# Altium PCB pcb.PcbDoc (part 2 of 6)
Units mm, origin at the board's own origin, x right, y up, seen from the top; angles counter-clockwise.
Board outline 85.44 x 182.72 mm, 2 copper layers (Top Layer, Bottom Layer); 68 components, 54 nets, 232 pads, 184 vias.
Unrouted connection lines stored in the file: 53.
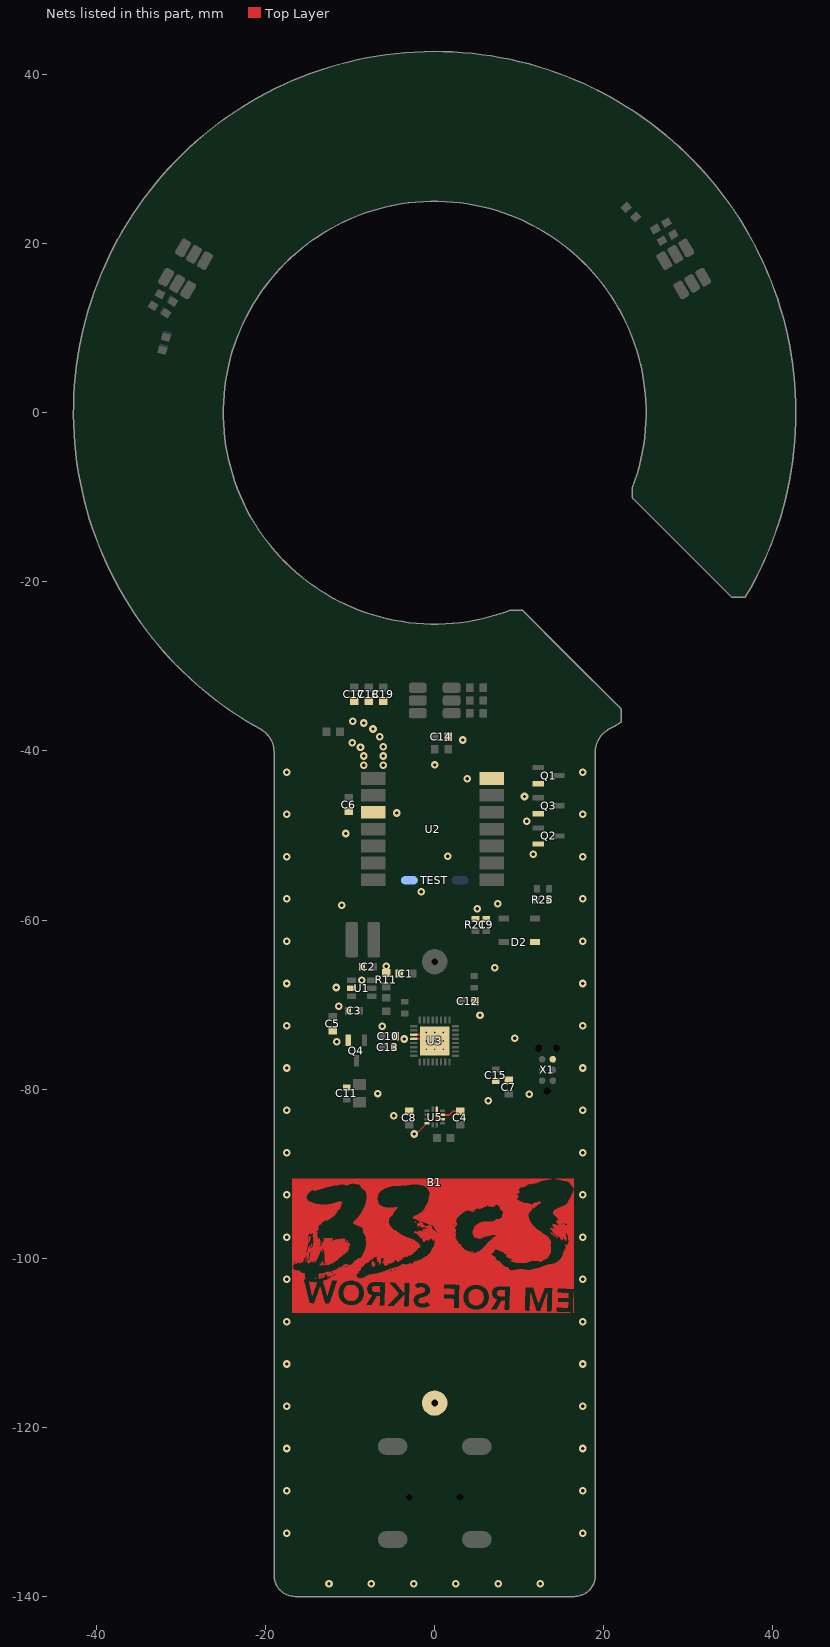
[diagram p2: the nets of this part, all layers, seen from the top]

## Via types
v1: diameter 0.9, hole 0.4, Top Layer to Bottom Layer, 143 vias
v2: diameter 1.27, hole 0.7, Top Layer to Bottom Layer, 32 vias
v3: diameter 0.5, hole 0.2, Top Layer to Bottom Layer, 9 vias

## Nets (pads, with @x,y where several pads share a name; then routed paths per layer and width w, separated by ;. In a path a pad name is that pad's centre, name@x,y a point inside that pad or via, vN(x,y) a via of type N, cw(c..) or ccw(c..) an arc to the next point about the centre after c; other vN are vias at no path point) (continued)
GND: (continued)
  Top Layer w0.025: -16.861,-106.391 16.007,-106.391 ; -16.861,-106.366 15.296,-106.366 ; -16.861,-106.34 14.534,-106.34 ; -16.861,-106.315 13.822,-106.315 ; -16.861,-106.29 13.238,-106.29 ; -16.861,-106.264 12.375,-106.264 ; -16.861,-106.239 12.019,-106.239 ; -16.861,-106.213 10.901,-106.213 ; -16.861,-106.188 10.622,-106.188 ; -16.861,-106.163 10.622,-106.163 ; -16.861,-106.137 8.717,-106.137 ; -16.861,-106.112 8.234,-106.112 ; -16.861,-106.086 7.269,-106.086 ; -16.861,-106.061 4.678,-106.061 ; -16.861,-106.036 4.526,-106.036 ; -16.861,-106.01 4.424,-106.01 ; -16.861,-105.985 4.348,-105.985 ; -16.861,-105.959 4.272,-105.959 ; -16.861,-105.934 4.196,-105.934 ; -16.861,-105.909 2.24,-105.909 ; -16.861,-105.883 2.24,-105.883 ; -16.861,-105.858 2.24,-105.858 ; -16.861,-105.832 -1.672,-105.832 ; -16.861,-105.807 -1.773,-105.807 ; -16.861,-105.782 -1.875,-105.782 ; -16.861,-105.756 -1.951,-105.756 ; -16.861,-105.731 -2.002,-105.731 ; -16.861,-105.705 -3.653,-105.705 ; -16.861,-105.68 -3.653,-105.68 ; -16.861,-105.655 -5.101,-105.655 ; -16.861,-105.629 -5.685,-105.629 ; -16.861,-105.604 -6.548,-105.604 ; -16.861,-105.578 -6.548,-105.578 ; -16.861,-105.553 -10.003,-105.553 ; -16.861,-105.528 -10.206,-105.528 ; -16.861,-105.502 -10.308,-105.502 ; -16.861,-105.477 -10.409,-105.477 ; -16.861,-105.451 -10.485,-105.451 ; -16.861,-105.426 -10.562,-105.426 ; -16.861,-105.401 -10.612,-105.401 ; -16.861,-105.375 -12.975,-105.375 ; -16.861,-105.35 -12.975,-105.35 ; -16.861,-105.324 -14.549,-105.324 ; -16.861,-105.299 -14.803,-105.299 ; -16.861,-105.274 -14.803,-105.274 ; -16.861,-105.248 -14.829,-105.248 ; -16.861,-105.223 -14.829,-105.223 ; -16.861,-105.197 -14.829,-105.197 ; -16.861,-105.172 -14.829,-105.172 ; -16.861,-105.147 -14.854,-105.147 ; -16.861,-105.121 -14.854,-105.121 ; -16.861,-105.096 -14.854,-105.096 ; -16.861,-105.07 -14.854,-105.07 ; -16.861,-105.045 -14.88,-105.045 ; -16.861,-105.02 -14.88,-105.02 ; -16.861,-104.994 -14.88,-104.994 ; -16.861,-104.969 -14.88,-104.969 ; -16.861,-104.943 -14.905,-104.943 ; -16.861,-104.918 -14.905,-104.918 ; -16.861,-104.893 -14.905,-104.893 ; -16.861,-104.867 -14.93,-104.867 ; -16.861,-104.842 -14.93,-104.842 ; -16.861,-104.816 -14.93,-104.816 ; -16.861,-104.791 -14.93,-104.791 ; -16.861,-104.766 -14.956,-104.766 ; -16.861,-104.74 -14.956,-104.74 ; -16.861,-104.715 -14.956,-104.715 ; -16.861,-104.689 -14.956,-104.689 ; -16.861,-104.664 -14.981,-104.664 ; -16.861,-104.639 -14.981,-104.639 ; -16.861,-104.613 -14.981,-104.613 ; -16.861,-104.588 -14.981,-104.588 ; -16.861,-104.562 -15.007,-104.562 ; -16.861,-104.537 -15.007,-104.537 ; -16.861,-104.512 -15.007,-104.512 ; -16.861,-104.486 -15.007,-104.486 ; -16.861,-104.461 -15.032,-104.461 ; -16.861,-104.435 -15.032,-104.435 ; -16.861,-104.41 -15.032,-104.41 ; -16.861,-104.385 -15.032,-104.385 ; -16.861,-104.359 -15.057,-104.359 ; -16.861,-104.334 -15.057,-104.334 ; -16.861,-104.308 -15.057,-104.308 ; -16.861,-104.283 -15.057,-104.283 ; -16.861,-104.258 -15.083,-104.258 ; -16.861,-104.232 -15.083,-104.232 ; -16.861,-104.207 -15.083,-104.207 ; -16.861,-104.181 -15.083,-104.181 ; -16.861,-104.156 -15.108,-104.156 ; -16.861,-104.131 -15.108,-104.131 ; -16.861,-104.105 -15.108,-104.105 ; -16.861,-104.08 -15.108,-104.08 ; -16.861,-104.054 -15.134,-104.054 ; -16.861,-104.029 -15.134,-104.029 ; -16.861,-104.004 -15.134,-104.004 ; -16.861,-103.978 -15.134,-103.978 ; -16.861,-103.953 -15.159,-103.953 ; -16.861,-103.927 -15.159,-103.927 ; -16.861,-103.902 -15.159,-103.902 ; -16.861,-103.877 -15.159,-103.877 ; -16.861,-103.851 -15.184,-103.851 ; -16.861,-103.826 -15.184,-103.826 ; -16.861,-103.8 -15.184,-103.8 ; -16.861,-103.775 -15.184,-103.775 ; -16.861,-103.75 -15.21,-103.75 ; -16.861,-103.724 -15.21,-103.724 ; -16.861,-103.699 -15.21,-103.699 ; -16.861,-103.673 -15.21,-103.673 ; -16.861,-103.648 -15.235,-103.648 ; -16.861,-103.623 -15.235,-103.623 ; -16.861,-103.597 -15.235,-103.597 ; -16.861,-103.572 -15.261,-103.572 ; -16.861,-103.546 -15.261,-103.546 ; -16.861,-103.521 -15.261,-103.521 ; -16.861,-103.496 -15.261,-103.496 ; -16.861,-103.47 -15.286,-103.47 ; -16.861,-103.445 -15.286,-103.445 ; -16.861,-103.419 -15.286,-103.419 ; -16.861,-103.394 -15.286,-103.394 ; -16.861,-103.369 -15.311,-103.369 ; -16.861,-103.343 -15.311,-103.343 ; -16.861,-103.318 -15.311,-103.318 ; -16.861,-103.292 -15.311,-103.292 ; -16.861,-103.267 -15.337,-103.267 ; -16.861,-103.242 -15.337,-103.242 ; -16.861,-103.216 -15.337,-103.216 ; -16.861,-103.191 -15.337,-103.191 ; -16.861,-103.165 -15.362,-103.165 ; -16.861,-103.14 -15.362,-103.14 ; -16.861,-103.115 -15.362,-103.115 ; -16.861,-103.089 -15.362,-103.089 ; -16.861,-103.064 -15.388,-103.064 ; -16.861,-103.038 -15.388,-103.038 ; -16.861,-103.013 -15.388,-103.013 ; -16.861,-102.988 -15.388,-102.988 ; -16.861,-102.962 -15.413,-102.962 ; -16.861,-102.937 -15.413,-102.937 ; -16.861,-102.911 -15.413,-102.911 ; -16.861,-102.886 -15.413,-102.886 ; -16.861,-102.861 -15.438,-102.861 ; -16.861,-102.835 -15.438,-102.835 ; -16.861,-102.81 -15.438,-102.81 ; -16.861,-102.784 -15.438,-102.784 ; -16.861,-102.759 -15.464,-102.759 ; -16.861,-102.734 -15.464,-102.734 ; -16.861,-102.708 -15.464,-102.708 ; -16.861,-102.683 -15.464,-102.683 ; -16.861,-102.657 -15.489,-102.657 ; -16.861,-102.632 -15.489,-102.632 ; -16.861,-102.607 -15.489,-102.607 ; -16.861,-102.581 -15.489,-102.581 ; -16.861,-102.556 -15.515,-102.556 ; -16.861,-102.53 -15.515,-102.53 ; -16.861,-102.505 -15.515,-102.505 ; -16.861,-102.48 -15.515,-102.48 ; -16.861,-102.454 -15.54,-102.454 ; -16.861,-102.429 -15.337,-102.429 ; -16.861,-102.403 -15.337,-102.403 ; -16.861,-102.378 -15.337,-102.378 ; -16.861,-102.353 -15.489,-102.353 ; -16.861,-102.327 -15.489,-102.327 ; -16.861,-102.302 -15.464,-102.302 ; -16.861,-102.276 -15.464,-102.276 ; -16.861,-102.251 -15.438,-102.251 ; -16.861,-102.226 -15.388,-102.226 ; -16.861,-102.2 -15.388,-102.2 ; -16.861,-102.175 -15.388,-102.175 ; -16.861,-102.149 -15.388,-102.149 ; -16.861,-102.124 -15.388,-102.124 ; -16.861,-102.099 -15.388,-102.099 ; -16.861,-102.073 -15.388,-102.073 ; -16.861,-102.048 -15.388,-102.048 ; -16.861,-102.022 -15.388,-102.022 ; -16.861,-101.997 -15.388,-101.997 ; -16.861,-101.972 -15.388,-101.972 ; -16.861,-101.946 -15.388,-101.946 ; -16.861,-101.921 -15.388,-101.921 ; -16.861,-101.895 -15.388,-101.895 ; -16.861,-101.87 -15.388,-101.87 ; -16.861,-101.845 -15.388,-101.845 ; -16.861,-101.819 -15.388,-101.819 ; -16.861,-101.794 -15.438,-101.794 ; -16.861,-101.768 -15.591,-101.768 ; -16.861,-101.743 -15.667,-101.743 ; -16.861,-101.718 -15.718,-101.718 ; -16.861,-101.692 -15.743,-101.692 ; -16.861,-101.667 -15.769,-101.667 ; -16.861,-101.641 -15.794,-101.641 ; -16.861,-101.616 -15.819,-101.616 ; -16.861,-101.591 -15.896,-101.591 ; -16.861,-101.565 -15.921,-101.565 ; -16.861,-101.54 -15.946,-101.54 ; -16.861,-101.514 -15.997,-101.514 ; -16.861,-101.489 -16.048,-101.489 ; -16.861,-101.464 -16.353,-101.464 ; -16.861,-101.438 -16.429,-101.438 ; -16.861,-101.413 -16.48,-101.413 ; -16.861,-101.387 -16.556,-101.387 ; -16.861,-101.362 -16.607,-101.362 ; -16.861,-101.337 -16.658,-101.337 ; -16.861,-101.311 -16.708,-101.311 ; -16.861,-101.286 -16.734,-101.286 ; -16.861,-101.26 -16.734,-101.26 ; -16.861,-101.235 -16.759,-101.235 ; -16.861,-101.21 -16.734,-101.21 ; -16.861,-101.184 -16.708,-101.184 ; -16.861,-101.159 -16.734,-101.159 ; -16.861,-101.133 -16.759,-101.133 ; -16.861,-101.108 -16.785,-101.108 ; -16.861,-101.083 -16.81,-101.083 ; -16.861,-101.057 -16.81,-101.057 ; -16.861,-101.032 -16.81,-101.032 ; -16.861,-101.006 -16.835,-101.006 ; -16.861,-100.981 -16.835,-100.981 ; -16.861,-100.956 -16.835,-100.956 ; -16.861,-100.879 -16.734,-100.879 ; -16.861,-100.854 -16.759,-100.854 ; -16.861,-100.829 -16.759,-100.829 ; -16.861,-100.803 -16.785,-100.803 ; -16.861,-100.778 -16.785,-100.778 ; -16.861,-100.752 -16.785,-100.752 ; -16.861,-100.727 -16.759,-100.727 ; -16.861,-100.702 -16.759,-100.702 ; -16.861,-100.676 -16.734,-100.676 ; -16.861,-100.651 -16.683,-100.651 ; -16.861,-100.625 -16.632,-100.625 ; -16.861,-100.6 -16.607,-100.6 ; -16.861,-100.575 -16.607,-100.575 ; -16.861,-100.549 -16.607,-100.549 ; -16.861,-100.524 -16.607,-100.524 ; -16.861,-100.498 -16.607,-100.498 ; -16.861,-100.473 -16.607,-100.473 ; -16.861,-100.448 -16.607,-100.448 ; -16.861,-100.422 -16.581,-100.422 ; -16.861,-100.397 -16.581,-100.397 ; -16.861,-100.371 -16.581,-100.371 ; -16.861,-100.346 -16.607,-100.346 ; -16.861,-100.321 -16.607,-100.321 ; -16.861,-100.295 -16.632,-100.295 ; -16.861,-100.27 -16.658,-100.27 ; -16.861,-100.244 -16.683,-100.244 ; -16.861,-100.219 -16.683,-100.219 ; -16.861,-100.194 -16.683,-100.194 ; -16.861,-100.168 -16.683,-100.168 ; -16.861,-100.143 -16.277,-100.143 ; -16.861,-100.117 -16.277,-100.117 ; -16.861,-100.092 -16.251,-100.092 ; -16.861,-100.067 -15.464,-100.067 ; -16.861,-100.041 -15.464,-100.041 ; -16.861,-100.016 -15.54,-100.016 ; -16.861,-99.99 -15.54,-99.99 ; -16.861,-99.965 -15.489,-99.965 ; -16.861,-99.94 -15.464,-99.94 ; -16.861,-99.914 -15.413,-99.914 ; -16.861,-99.889 -15.362,-99.889 ; -16.861,-99.863 -15.337,-99.863 ; -16.861,-99.838 -15.311,-99.838 ; -16.861,-99.813 -15.286,-99.813 ; -16.861,-99.787 -15.286,-99.787 ; -16.861,-99.762 -15.261,-99.762 ; -16.861,-99.736 -15.261,-99.736 ; -16.861,-99.711 -15.261,-99.711 ; -16.861,-99.686 -15.235,-99.686 ; -16.861,-99.66 -15.235,-99.66 ; -16.861,-99.635 -15.235,-99.635 ; -16.861,-99.609 -15.235,-99.609 ; -16.861,-99.584 -14.905,-99.584 ; -16.861,-99.559 -14.88,-99.559 ; -16.861,-99.533 -14.88,-99.533 ; -16.861,-99.508 -14.88,-99.508 ; -16.861,-99.482 -15.184,-99.482 ; -16.861,-99.457 -15.21,-99.457 ; -16.861,-99.432 -15.21,-99.432 ; -16.861,-99.406 -15.235,-99.406 ; -16.861,-99.381 -15.235,-99.381 ; -16.861,-99.355 -15.235,-99.355 ; -16.861,-99.33 -15.235,-99.33 ; -16.861,-99.305 -15.235,-99.305 ; -16.861,-99.279 -15.235,-99.279 ; -16.861,-99.254 -15.235,-99.254 ; -16.861,-99.228 -15.235,-99.228 ; -16.861,-99.203 -15.235,-99.203 ; -16.861,-99.178 -15.235,-99.178 ; -16.861,-99.152 -15.235,-99.152 ; -16.861,-99.127 -15.235,-99.127 ; -16.861,-99.101 -15.21,-99.101 ; -16.861,-99.076 -15.21,-99.076 ; -16.861,-99.051 -15.184,-99.051 ; -16.861,-99.025 -15.184,-99.025 ; -16.861,-99 -15.159,-99 ; -16.861,-98.974 -15.159,-98.974 ; -16.861,-98.949 -15.159,-98.949 ; -16.861,-98.924 -15.184,-98.924 ; -16.861,-98.898 -15.184,-98.898 ; -16.861,-98.873 -15.159,-98.873 ; -16.861,-98.847 -15.083,-98.847 ; -16.861,-98.822 -15.108,-98.822 ; -16.861,-98.797 -15.108,-98.797 ; -16.861,-98.771 -15.134,-98.771 ; -16.861,-98.746 -15.134,-98.746 ; -16.861,-98.72 -15.134,-98.72 ; -16.861,-98.695 -15.108,-98.695 ; -16.861,-98.67 -15.108,-98.67 ; -16.861,-98.644 -15.083,-98.644 ; -16.861,-98.619 -15.083,-98.619 ; -16.861,-98.593 -15.083,-98.593 ; -16.861,-98.568 -15.083,-98.568 ; -16.861,-98.543 -15.083,-98.543 ; -16.861,-98.517 -15.057,-98.517 ; -16.861,-98.492 -15.007,-98.492 ; -16.861,-98.466 -15.007,-98.466 ; -16.861,-98.441 -15.057,-98.441 ; -16.861,-98.416 -15.057,-98.416 ; -16.861,-98.39 -15.057,-98.39 ; -16.861,-98.365 -15.032,-98.365 ; -16.861,-98.339 -15.032,-98.339 ; -16.861,-98.314 -15.032,-98.314 ; -16.861,-98.289 -15.032,-98.289 ; -16.861,-98.263 -15.032,-98.263 ; -16.861,-98.238 -15.032,-98.238 ; -16.861,-98.212 -15.032,-98.212 ; -16.861,-98.187 -15.007,-98.187 ; -16.861,-98.162 -15.007,-98.162 ; -16.861,-98.136 -15.007,-98.136 ; -16.861,-98.111 -15.007,-98.111 ; -16.861,-98.085 -15.007,-98.085 ; -16.861,-98.06 -15.007,-98.06 ; -16.861,-98.035 -14.981,-98.035 ; -16.861,-98.009 -14.981,-98.009 ; -16.861,-97.984 -14.981,-97.984 ; -16.861,-97.958 -14.981,-97.958 ; -16.861,-97.933 -14.981,-97.933 ; -16.861,-97.908 -14.956,-97.908 ; -16.861,-97.882 -14.956,-97.882 ; -16.861,-97.857 -14.956,-97.857 ; -16.861,-97.831 -14.956,-97.831 ; -16.861,-97.806 -14.956,-97.806 ; -16.861,-97.781 -14.956,-97.781 ; -16.861,-97.755 -14.956,-97.755 ; -16.861,-97.73 -14.956,-97.73 ; -16.861,-97.704 -14.956,-97.704 ; -16.861,-97.679 -14.956,-97.679 ; -16.861,-97.654 -14.956,-97.654 ; -16.861,-97.628 -14.981,-97.628 ; -16.861,-97.603 -14.981,-97.603 ; -16.861,-97.577 -14.981,-97.577 ; -16.861,-97.552 -14.981,-97.552 ; -16.861,-97.527 -14.981,-97.527 ; -16.861,-97.501 -14.981,-97.501 ; -16.861,-97.476 -14.981,-97.476 ; -16.861,-97.45 -14.981,-97.45 ; -16.861,-97.425 -14.981,-97.425 ; -16.861,-97.4 -14.981,-97.4 ; -16.861,-97.374 -14.981,-97.374 ; -16.861,-97.349 -14.981,-97.349 ; -16.861,-97.323 -15.007,-97.323 ; -16.861,-97.298 -15.007,-97.298 ; -16.861,-97.273 -15.007,-97.273 ; -16.861,-97.247 -15.007,-97.247 ; -16.861,-97.222 -15.007,-97.222 ; -16.861,-97.196 -15.007,-97.196 ; -16.861,-97.171 -14.88,-97.171 ; -16.861,-97.146 -14.88,-97.146 ; -16.861,-97.12 -14.88,-97.12 ; -16.861,-97.095 -14.88,-97.095 ; -16.861,-97.069 -14.854,-97.069 ; -16.861,-97.044 -14.854,-97.044 ; -16.861,-97.019 -14.829,-97.019 ; -16.861,-96.993 -14.803,-96.993 ; -16.861,-96.968 -14.803,-96.968 ; -16.861,-96.942 -14.778,-96.942 ; -16.861,-96.917 -13.94,-96.917 ; -16.861,-96.892 -13.94,-96.892 ; -16.861,-96.866 -13.965,-96.866 ; -16.861,-96.841 -13.965,-96.841 ; -16.861,-96.815 -13.991,-96.815 ; -16.861,-96.79 -13.991,-96.79 ; -16.861,-96.765 -14.016,-96.765 ; -16.861,-96.739 -14.016,-96.739 ; -16.861,-96.714 -14.016,-96.714 ; -16.861,-96.688 -13.94,-96.688 ; -16.861,-96.663 -13.864,-96.663 ; -16.861,-96.638 -13.864,-96.638 ; -16.861,-96.612 -13.838,-96.612 ; -16.861,-96.587 -13.838,-96.587 ; -16.861,-96.561 -13.813,-96.561 ; -16.861,-96.536 -13.813,-96.536 ; -16.861,-96.511 -13.813,-96.511 ; -16.861,-96.485 -13.787,-96.485 ; -16.861,-96.46 -13.787,-96.46 ; -16.861,-96.434 -13.787,-96.434 ; -16.861,-96.409 -13.787,-96.409 ; -16.861,-96.384 -13.787,-96.384 ; -16.861,-96.358 -13.787,-96.358 ; -16.861,-96.333 -13.813,-96.333 ; -16.861,-96.307 -13.787,-96.307 ; -16.861,-96.282 -13.787,-96.282 ; -16.861,-96.257 -13.787,-96.257 ; -16.861,-96.231 -13.762,-96.231 ; -16.861,-96.206 -13.762,-96.206 ; -16.861,-96.18 -13.737,-96.18 ; -16.861,-96.155 -13.737,-96.155 ; -16.861,-96.13 -13.711,-96.13 ; -16.861,-96.104 -13.711,-96.104 ; -16.861,-96.079 -13.686,-96.079 ; -16.861,-96.053 -13.686,-96.053 ; -16.861,-96.028 -13.686,-96.028 ; -16.861,-96.003 -13.66,-96.003 ; -16.861,-95.977 -13.635,-95.977 ; -16.861,-95.952 -13.61,-95.952 ; -16.861,-95.926 -13.584,-95.926 ; -16.861,-95.901 -13.559,-95.901 ; -16.861,-95.876 -13.432,-95.876 ; -16.861,-95.85 -13.432,-95.85 ; -16.861,-95.825 -13.432,-95.825 ; -16.861,-95.799 -13.406,-95.799 ; -16.861,-95.774 -13.406,-95.774 ; -16.861,-95.749 -13.381,-95.749 ; -16.861,-95.723 -13.356,-95.723 ; -16.861,-95.698 -13.33,-95.698 ; -16.861,-95.672 -13.305,-95.672 ; -16.861,-95.647 -13.254,-95.647 ; -16.861,-95.622 -13.229,-95.622 ; -16.861,-95.596 -13.203,-95.596 ; -16.861,-95.571 -13.178,-95.571 ; -16.861,-95.545 -13.127,-95.545 ; -16.861,-95.52 -13.076,-95.52 ; -16.861,-95.495 -13.025,-95.495 ; -16.861,-95.469 -12.721,-95.469 ; -16.861,-95.444 -12.695,-95.444 ; -16.861,-95.418 -12.67,-95.418 ; -16.861,-95.393 -12.619,-95.393 ; -16.861,-95.368 -12.594,-95.368 ; -16.861,-95.342 -12.543,-95.342 ; -16.861,-95.317 -12.492,-95.317 ; -16.861,-95.291 -12.467,-95.291 ; -16.861,-95.266 -12.416,-95.266 ; -16.861,-95.241 -12.39,-95.241 ; -16.861,-95.215 -12.365,-95.215 ; -16.861,-95.19 -12.314,-95.19 ; -16.861,-95.164 -12.289,-95.164 ; -16.861,-95.139 -12.238,-95.139 ; -16.861,-95.114 -12.213,-95.114 ; -16.861,-95.088 -12.187,-95.088 ; -16.861,-95.063 -12.136,-95.063 ; -16.861,-95.037 -12.111,-95.037 ; -16.861,-95.012 -12.06,-95.012 ; -16.861,-94.987 -12.009,-94.987 ; -16.861,-94.961 -11.959,-94.961 ; -16.861,-94.936 -11.933,-94.936 ; -16.861,-94.91 -11.908,-94.91 ; -16.861,-94.885 -11.882,-94.885 ; -16.861,-94.86 -11.832,-94.86 ; -16.861,-94.834 -11.806,-94.834 ; -16.861,-94.809 -11.781,-94.809 ; -16.861,-94.783 -11.781,-94.783 ; -16.861,-94.758 -11.755,-94.758 ; -16.861,-94.733 -11.755,-94.733 ; -16.861,-94.707 -11.755,-94.707 ; -16.861,-94.682 -11.73,-94.682 ; -16.861,-94.656 -11.705,-94.656 ; -16.861,-94.631 -11.705,-94.631 ; -16.861,-94.606 -11.679,-94.606 ; -16.861,-94.58 -11.654,-94.58 ; -16.861,-94.555 -11.628,-94.555 ; -16.861,-94.529 -11.603,-94.529 ; -16.861,-94.504 -11.603,-94.504 ; -16.861,-94.479 -11.578,-94.479 ; -16.861,-94.453 -11.552,-94.453 ; -16.861,-94.428 -11.527,-94.428 ; -16.861,-94.402 -11.527,-94.402 ; -16.861,-94.377 -11.501,-94.377 ; -16.861,-94.352 -11.501,-94.352 ; -16.861,-94.326 -11.476,-94.326 ; -16.861,-94.301 -11.476,-94.301 ; -16.861,-94.275 -11.451,-94.275 ; -16.861,-94.25 -11.451,-94.25 ; -16.861,-94.225 -11.425,-94.225 ; -16.861,-94.199 -11.374,-94.199 ; -16.861,-94.174 -11.349,-94.174 ; -16.861,-94.148 -11.324,-94.148 ; -16.861,-94.123 -11.273,-94.123 ; -16.861,-94.098 -11.247,-94.098 ; -16.861,-94.072 -11.222,-94.072 ; -16.861,-94.047 -11.222,-94.047 ; -16.861,-94.021 -11.197,-94.021 ; -16.861,-93.996 -11.197,-93.996 ; -16.861,-93.971 -11.171,-93.971 ; -16.861,-93.945 -11.171,-93.945 ; -16.861,-93.92 -11.146,-93.92 ; -16.861,-93.894 -11.146,-93.894 ; -16.861,-93.869 -11.146,-93.869 ; -16.861,-93.844 -11.12,-93.844 ; -16.861,-93.818 -11.12,-93.818 ; -16.861,-93.793 -11.12,-93.793 ; -16.861,-93.767 -11.12,-93.767 ; -16.861,-93.742 -11.12,-93.742 ; -16.861,-93.717 -11.12,-93.717 ; -16.861,-93.691 -11.12,-93.691 ; -16.861,-93.666 -11.095,-93.666 ; -16.861,-93.64 -13.457,-93.64 ; -16.861,-93.615 -13.559,-93.615 ; -16.861,-93.59 -13.914,-93.59 ; -16.861,-93.564 -14.067,-93.564 ; -16.861,-93.539 -14.143,-93.539 ; -16.861,-93.513 -14.219,-93.513 ; -16.861,-93.488 -14.27,-93.488 ; -16.861,-93.463 -14.346,-93.463 ; -16.861,-93.437 -14.422,-93.437 ; -16.861,-93.412 -14.473,-93.412 ; -16.861,-93.386 -14.549,-93.386 ; -16.861,-93.361 -14.626,-93.361 ; -16.861,-93.336 -14.727,-93.336 ; -16.861,-93.31 -14.778,-93.31 ; -16.861,-93.285 -14.829,-93.285 ; -16.861,-93.259 -14.88,-93.259 ; -16.861,-93.234 -14.905,-93.234 ; -16.861,-93.209 -14.93,-93.209 ; -16.861,-93.183 -14.956,-93.183 ; -16.861,-93.158 -15.007,-93.158 ; -16.861,-93.132 -15.007,-93.132 ; -16.861,-93.107 -15.032,-93.107 ; -16.861,-93.082 -15.057,-93.082 ; -16.861,-93.056 -15.083,-93.056 ; -16.861,-93.031 -15.083,-93.031 ; -16.861,-93.005 -15.108,-93.005 ; -16.861,-92.98 -15.134,-92.98 ; -16.861,-92.955 -15.134,-92.955 ; -16.861,-92.929 -15.159,-92.929 ; -16.861,-92.904 -15.159,-92.904 ; -16.861,-92.878 -15.184,-92.878 ; -16.861,-92.853 -15.184,-92.853 ; -16.861,-92.828 -15.184,-92.828 ; -16.861,-92.802 -15.184,-92.802 ; -16.861,-92.777 -15.184,-92.777 ; -16.861,-92.751 -15.184,-92.751 ; -16.861,-92.726 -15.184,-92.726 ; -16.861,-92.701 -15.184,-92.701 ; -16.861,-92.675 -15.159,-92.675 ; -16.861,-92.65 -15.134,-92.65 ; -16.861,-92.624 -15.134,-92.624 ; -16.861,-92.599 -15.134,-92.599 ; -16.861,-92.574 -15.108,-92.574 ; -16.861,-92.548 -15.108,-92.548 ; -16.861,-92.523 -15.108,-92.523 ; -16.861,-92.497 -15.108,-92.497 ; -16.861,-92.472 -15.108,-92.472 ; -16.861,-92.447 -15.083,-92.447 ; -16.861,-92.421 -15.083,-92.421 ; -16.861,-92.396 -15.083,-92.396 ; -16.861,-92.37 -15.057,-92.37 ; -16.861,-92.345 -15.057,-92.345 ; -16.861,-92.32 -15.032,-92.32 ; -16.861,-92.294 -15.032,-92.294 ; -16.861,-92.269 -15.007,-92.269 ; -16.861,-92.243 -14.981,-92.243 ; -16.861,-92.218 -14.956,-92.218 ; -16.861,-92.193 -14.93,-92.193 ; -16.861,-92.167 -14.905,-92.167 ; -16.861,-92.142 -14.88,-92.142 ; -16.861,-92.116 -14.854,-92.116 ; -16.861,-92.091 -14.803,-92.091 ; -16.861,-92.066 -14.778,-92.066 ; -16.861,-92.04 -14.778,-92.04 ; -16.861,-92.015 -14.753,-92.015 ; -16.861,-91.989 -14.702,-91.989 ; -16.861,-91.964 -14.676,-91.964 ; -16.861,-91.939 -14.575,-91.939 ; -16.861,-91.913 -14.524,-91.913 ; -16.861,-91.888 -14.499,-91.888 ; -16.861,-91.862 -14.499,-91.862 ; -16.861,-91.837 -13.711,-91.837 ; -16.861,-91.812 -13.635,-91.812 ; -16.861,-91.786 -13.559,-91.786 ; -16.861,-91.761 -13.508,-91.761 ; -16.861,-91.735 -13.432,-91.735 ; -16.861,-91.71 -13.381,-91.71 ; -16.861,-91.685 -13.305,-91.685 ; -16.861,-91.659 -13.203,-91.659 ; -16.861,-91.634 -13.102,-91.634 ; -16.861,-91.608 -13.025,-91.608 ; -16.861,-91.583 -12.924,-91.583 ; -16.861,-91.558 -12.848,-91.558 ; -16.861,-91.532 -12.746,-91.532 ; -16.861,-91.507 -12.644,-91.507 ; -16.861,-91.481 -12.568,-91.481 ; -16.861,-91.456 -12.467,-91.456 ; -16.861,-91.431 -12.365,-91.431 ; -16.861,-91.405 -12.263,-91.405 ; -16.861,-91.38 -12.162,-91.38 ; -16.861,-91.354 -12.06,-91.354 ; -16.861,-91.329 -11.959,-91.329 ; -16.861,-91.304 -11.781,-91.304 ; -16.861,-91.278 -11.4,-91.278 ; -16.861,-91.253 -11.324,-91.253 ; -16.861,-91.227 -11.222,-91.227 ; -16.861,-91.202 -10.993,-91.202 ; -16.861,-91.177 -10.079,-91.177 ; -16.861,-91.151 -10.028,-91.151 ; -16.861,-91.126 -9.927,-91.126 ; -16.861,-91.1 -9.749,-91.1 ; -16.861,-91.075 11.663,-91.075 ; -16.861,-91.05 11.994,-91.05 ; -16.861,-91.024 12.07,-91.024 ; -16.861,-90.999 12.121,-90.999 ; -16.861,-90.973 12.197,-90.973 ; -16.861,-90.948 12.248,-90.948 ; -16.861,-90.923 12.298,-90.923 ; -16.861,-90.897 12.349,-90.897 ; -16.861,-90.872 12.4,-90.872 ; -16.861,-90.846 12.476,-90.846 ; -16.861,-90.821 12.527,-90.821 ; -16.861,-90.796 12.603,-90.796 ; -16.861,-90.77 12.705,-90.77 ; -16.861,-90.745 12.806,-90.745 ; -16.861,-90.719 12.959,-90.719 ; -16.861,-90.694 13.137,-90.694 ; -16.861,-90.669 13.289,-90.669 ; -16.861,-90.643 13.441,-90.643 ; -16.861,-90.618 13.619,-90.618 ; -16.861,-90.592 13.797,-90.592 ; -16.759,-100.905 -16.734,-100.905 ; -16.734,-101.032 -16.708,-101.032 ; -16.581,-100.168 -16.302,-100.168 ; -16.556,-100.219 -16.378,-100.219 ; -16.556,-100.194 -16.327,-100.194 ; -16.531,-100.27 -16.353,-100.27 ; -16.531,-100.244 -16.378,-100.244 ; -16.505,-100.549 -16.327,-100.549 ; -16.505,-100.295 -16.327,-100.295 ; -16.48,-100.321 -16.327,-100.321 ; -16.454,-100.575 -16.327,-100.575 ; -16.454,-100.524 -16.327,-100.524 ; -16.454,-100.346 -16.327,-100.346 ; -16.429,-100.422 -16.353,-100.422 ; -16.429,-100.397 -16.353,-100.397 ; -16.429,-100.371 -16.327,-100.371 ; -16.404,-100.498 -16.327,-100.498 ; -16.404,-100.473 -16.327,-100.473 ; -16.404,-100.448 -16.353,-100.448 ; -16.378,-100.6 -16.302,-100.6 ; -16.226,-100.371 -16.15,-100.371 ; -16.226,-100.346 -16.099,-100.346 ; -16.226,-100.321 -15.819,-100.321 ; -16.226,-100.295 -15.819,-100.295 ; -16.226,-100.27 -15.794,-100.27 ; -16.226,-100.244 -15.769,-100.244 ; -16.226,-100.219 -15.743,-100.219 ; -16.226,-100.194 -15.718,-100.194 ; -16.226,-100.168 -15.692,-100.168 ; -16.226,-100.143 -15.667,-100.143 ; -16.226,-100.117 -15.642,-100.117 ; -16.226,-100.092 -15.616,-100.092 ; -16.2,-100.422 -16.15,-100.422 ; -16.2,-100.397 -16.15,-100.397 ; -16.175,-100.448 -16.15,-100.448 ; -16.073,-100.448 -15.972,-100.448 ; -16.073,-100.422 -15.946,-100.422 ; -16.073,-100.397 -15.921,-100.397 ; -16.073,-100.371 -15.819,-100.371 ; -16.073,-100.346 -15.819,-100.346 ; -16.048,-100.473 -16.023,-100.473 ; -15.896,-100.498 -15.87,-100.498 ; -15.769,-100.371 -15.692,-100.371 ; -15.743,-100.397 -15.692,-100.397 ; -15.743,-100.346 -15.692,-100.346 ; -15.718,-100.321 -15.692,-100.321 ; -15.667,-100.397 -15.616,-100.397 ; -15.667,-100.219 -15.54,-100.219 ; -15.642,-100.371 -15.616,-100.371 ; -15.642,-100.346 -15.591,-100.346 ; -15.642,-100.321 -15.591,-100.321 ; -15.642,-100.295 -15.565,-100.295 ; -15.642,-100.27 -15.565,-100.27 ; -15.642,-100.244 -15.54,-100.244 ; -15.642,-100.194 -15.54,-100.194 ; -15.616,-100.168 -15.515,-100.168 ; -15.616,-100.143 -15.489,-100.143 ; -15.591,-100.117 -15.489,-100.117 ; -15.591,-100.092 -15.464,-100.092 ; -15.489,-100.016 -15.464,-100.016 ; -15.337,-100.194 -15.286,-100.194 ; -15.337,-100.168 -15.311,-100.168 ; -15.311,-100.219 -15.286,-100.219 ; -15.286,-100.168 -15.261,-100.168 ; -15.261,-100.143 -15.184,-100.143 ; -15.261,-100.117 -15.184,-100.117 ; -15.235,-100.27 -15.21,-100.27 ; -15.159,-99.609 -14.905,-99.609 ; -15.159,-99.482 -14.88,-99.482 ; -15.134,-99.457 -14.88,-99.457 ; -15.134,-99.432 -14.88,-99.432 ; -15.134,-98.898 -15.108,-98.898 ; -15.134,-98.873 -15.083,-98.873 ; -15.108,-99.94 -14.956,-99.94 ; -15.108,-99.914 -14.956,-99.914 ; -15.108,-99.889 -14.981,-99.889 ; -15.108,-99.863 -14.981,-99.863 ; -15.108,-99.838 -14.956,-99.838 ; -15.108,-99.813 -14.93,-99.813 ; -15.108,-99.787 -14.93,-99.787 ; -15.108,-99.762 -14.905,-99.762 ; -15.108,-99.736 -14.905,-99.736 ; -15.108,-99.711 -14.905,-99.711 ; -15.108,-99.686 -14.905,-99.686 ; -15.108,-99.66 -14.905,-99.66 ; -15.108,-99.635 -14.905,-99.635 ; -15.108,-99.33 -14.854,-99.33 ; -15.108,-99.305 -14.854,-99.305 ; -15.083,-100.397 -14.702,-100.397 ; -15.083,-100.371 -14.702,-100.371 ; -15.083,-100.346 -15.007,-100.346 ; -15.083,-100.092 -15.032,-100.092 ; -15.083,-100.067 -15.032,-100.067 ; -15.083,-100.041 -15.032,-100.041 ; -15.083,-100.016 -15.007,-100.016 ; -15.083,-99.99 -14.981,-99.99 ; -15.083,-99.965 -14.981,-99.965 ; -15.083,-99.279 -14.829,-99.279 ; -15.083,-99.254 -14.829,-99.254 ; -15.083,-99.228 -14.829,-99.228 ; -15.083,-99.203 -14.829,-99.203 ; -15.057,-100.321 -15.032,-100.321 ; -15.057,-99.178 -14.829,-99.178 ; -15.057,-99.152 -14.803,-99.152 ; -15.032,-100.422 -14.753,-100.422 ; -15.032,-99.406 -14.854,-99.406 ; -15.032,-99.381 -14.854,-99.381 ; -15.032,-99.355 -14.854,-99.355 ; -15.032,-99.127 -14.803,-99.127 ; -15.032,-99.101 -14.803,-99.101 ; -15.007,-99.076 -14.803,-99.076 ; -14.981,-100.448 -14.778,-100.448 ; -14.981,-99.051 -14.778,-99.051 ; -14.956,-100.473 -14.829,-100.473 ; -14.956,-100.346 -14.702,-100.346 ; -14.956,-99.025 -14.778,-99.025 ; -14.956,-99 -14.803,-99 ; -14.93,-100.498 -14.88,-100.498 ; -14.93,-100.321 -14.702,-100.321 ; -14.93,-100.295 -14.676,-100.295 ; -14.93,-100.27 -14.676,-100.27 ; -14.93,-100.244 -14.651,-100.244 ; -14.93,-98.974 -14.803,-98.974 ; -14.93,-98.949 -14.803,-98.949 ; -14.93,-98.924 -14.803,-98.924 ; -14.93,-98.898 -14.778,-98.898 ; -14.93,-98.873 -14.778,-98.873 ; -14.93,-98.847 -14.778,-98.847 ; -14.93,-98.822 -14.778,-98.822 ; -14.93,-98.797 -14.778,-98.797 ; -14.93,-98.771 -14.778,-98.771 ; -14.93,-98.746 -14.753,-98.746 ; -14.93,-98.111 -14.905,-98.111 ; -14.93,-98.085 -14.905,-98.085 ; -14.93,-98.06 -14.905,-98.06 ; -14.93,-98.035 -14.88,-98.035 ; -14.93,-98.009 -14.88,-98.009 ; -14.93,-97.984 -14.854,-97.984 ; -14.93,-97.958 -14.854,-97.958 ; -14.93,-97.933 -14.829,-97.933 ; -14.905,-98.72 -14.753,-98.72 ; -14.88,-98.695 -14.753,-98.695 ; -14.854,-98.67 -14.753,-98.67 ; -14.854,-98.416 -14.829,-98.416 ; -14.854,-98.39 -14.829,-98.39 ; -14.854,-97.908 -14.803,-97.908 ; -14.854,-97.882 -14.778,-97.882 ; -14.854,-97.857 -14.778,-97.857 ; -14.829,-102.835 -14.422,-102.835 ; -14.829,-102.81 -14.6,-102.81 ; -14.829,-102.784 -14.702,-102.784 ; -14.829,-102.759 -14.778,-102.759 ; -14.829,-100.041 -14.473,-100.041 ; -14.829,-100.016 -14.473,-100.016 ; -14.829,-98.644 -14.753,-98.644 ; -14.829,-98.619 -14.753,-98.619 ; -14.829,-98.593 -14.753,-98.593 ; -14.829,-97.831 -14.753,-97.831 ; -14.829,-97.806 -14.753,-97.806 ; -14.829,-97.781 -14.753,-97.781 ; -14.829,-97.755 -14.753,-97.755 ; -14.829,-97.73 -14.753,-97.73 ; -14.829,-97.704 -14.753,-97.704 ; -14.829,-97.679 -14.727,-97.679 ; -14.829,-97.654 -14.727,-97.654 ; -14.829,-97.628 -14.727,-97.628 ; -14.829,-97.603 -14.727,-97.603 ; -14.829,-97.577 -14.727,-97.577 ; -14.829,-97.552 -14.727,-97.552 ; -14.829,-97.527 -14.727,-97.527 ; -14.829,-97.501 -14.727,-97.501 ; -14.829,-97.476 -14.727,-97.476 ; -14.803,-102.962 -13.991,-102.962 ; -14.803,-102.937 -13.991,-102.937 ; -14.803,-102.911 -13.965,-102.911 ; -14.803,-102.886 -13.965,-102.886 ; -14.803,-102.861 -14.295,-102.861 ; -14.803,-100.219 -14.626,-100.219 ; -14.803,-100.194 -14.6,-100.194 ; -14.803,-100.168 -14.6,-100.168 ; -14.803,-100.143 -14.499,-100.143 ; -14.803,-100.117 -14.499,-100.117 ; -14.803,-100.092 -14.524,-100.092 ; -14.803,-100.067 -14.524,-100.067 ; -14.803,-99.99 -14.473,-99.99 ; -14.803,-99.965 -14.524,-99.965 ; -14.803,-99.94 -14.549,-99.94 ; -14.803,-99.914 -14.549,-99.914 ; -14.803,-99.889 -14.549,-99.889 ; -14.803,-99.863 -14.549,-99.863 ; -14.803,-98.568 -14.753,-98.568 ; -14.803,-98.543 -14.778,-98.543 ; -14.803,-98.517 -14.778,-98.517 ; -14.803,-97.45 -14.727,-97.45 ; -14.778,-103.064 -14.016,-103.064 ; -14.778,-103.038 -14.016,-103.038 ; -14.778,-103.013 -14.016,-103.013 ; -14.778,-102.988 -13.991,-102.988 ; -14.778,-99.838 -14.499,-99.838 ; -14.778,-99.813 -14.473,-99.813 ; -14.778,-97.425 -14.727,-97.425 ; -14.778,-97.4 -14.702,-97.4 ; -14.753,-103.191 -14.067,-103.191 ; -14.753,-103.165 -14.067,-103.165 ; -14.753,-103.14 -14.041,-103.14 ; -14.753,-103.115 -14.041,-103.115 ; -14.753,-103.089 -14.041,-103.089 ; -14.753,-99.787 -14.448,-99.787 ; -14.753,-96.942 -13.914,-96.942 ; -14.727,-103.292 -14.092,-103.292 ; -14.727,-103.267 -14.092,-103.267 ; -14.727,-103.242 -14.092,-103.242 ; -14.727,-103.216 -14.067,-103.216 ; -14.727,-99.762 -14.448,-99.762 ; -14.727,-99.736 -13.787,-99.736 ; -14.727,-99.66 -13.762,-99.66 ; -14.727,-99.635 -13.762,-99.635 ; -14.727,-99.609 -13.762,-99.609 ; -14.727,-99.584 -13.762,-99.584 ; -14.727,-99.559 -13.737,-99.559 ; -14.727,-99.533 -13.737,-99.533 ; -14.727,-96.968 -13.914,-96.968 ; -14.702,-103.419 -14.143,-103.419 ; -14.702,-103.394 -14.143,-103.394 ; -14.702,-103.369 -14.143,-103.369 ; -14.702,-103.343 -14.118,-103.343 ; -14.702,-103.318 -14.118,-103.318 ; -14.702,-99.711 -13.762,-99.711 ; -14.702,-99.686 -13.762,-99.686 ; -14.702,-99.508 -13.737,-99.508 ; -14.702,-99.482 -13.737,-99.482 ; -14.702,-99.457 -13.737,-99.457 ; -14.702,-99.432 -13.737,-99.432 ; -14.702,-99.406 -13.737,-99.406 ; -14.702,-99.381 -13.737,-99.381 ; -14.702,-99.178 -13.584,-99.178 ; -14.702,-99.152 -13.584,-99.152 ; -14.702,-99.127 -13.559,-99.127 ; -14.702,-99.101 -13.559,-99.101 ; -14.702,-99.076 -13.559,-99.076 ; -14.702,-99.051 -13.559,-99.051 ; -14.702,-99.025 -13.559,-99.025 ; -14.702,-99 -13.559,-99 ; -14.702,-98.974 -13.559,-98.974 ; -14.702,-98.949 -13.559,-98.949 ; -14.702,-98.924 -13.559,-98.924 ; -14.702,-98.898 -13.559,-98.898 ; -14.702,-98.873 -13.584,-98.873 ; -14.702,-98.847 -13.584,-98.847 ; -14.702,-96.993 -14.499,-96.993 ; -14.676,-103.521 -14.194,-103.521 ; -14.676,-103.496 -14.168,-103.496 ; -14.676,-103.47 -14.168,-103.47 ; -14.676,-103.445 -14.168,-103.445 ; -14.676,-99.355 -13.762,-99.355 ; -14.676,-99.33 -13.762,-99.33 ; -14.676,-99.305 -13.762,-99.305 ; -14.676,-98.822 -14.499,-98.822 ; -14.676,-98.797 -14.575,-98.797 ; -14.676,-98.771 -14.575,-98.771 ; -14.676,-98.746 -14.575,-98.746 ; -14.676,-98.72 -14.575,-98.72 ; -14.676,-97.019 -14.549,-97.019 ; -14.651,-103.648 -14.219,-103.648 ; -14.651,-103.623 -14.219,-103.623 ; -14.651,-103.597 -14.219,-103.597 ; -14.651,-103.572 -14.194,-103.572 ; -14.651,-103.546 -14.194,-103.546 ; -14.651,-99.279 -13.762,-99.279 ; -14.651,-99.254 -13.762,-99.254 ; -14.651,-99.228 -13.584,-99.228 ; -14.651,-99.203 -13.584,-99.203 ; -14.651,-98.695 -14.575,-98.695 ; -14.651,-98.67 -14.575,-98.67 ; -14.651,-98.644 -14.575,-98.644 ; -14.626,-103.775 -14.27,-103.775 ; -14.626,-103.75 -14.27,-103.75 ; -14.626,-103.724 -14.27,-103.724 ; -14.626,-103.699 -14.245,-103.699 ; -14.626,-103.673 -14.245,-103.673 ; -14.626,-98.619 -14.575,-98.619 ; -14.626,-98.593 -14.575,-98.593 ; -14.626,-98.568 -14.575,-98.568 ; -14.626,-98.543 -14.549,-98.543 ; -14.626,-98.517 -14.549,-98.517 ; -14.626,-98.492 -14.549,-98.492 ; -14.626,-98.466 -14.575,-98.466 ; -14.626,-98.441 -14.575,-98.441 ; -14.626,-98.416 -14.575,-98.416 ; -14.6,-103.877 -14.321,-103.877 ; -14.6,-103.851 -14.295,-103.851 ; -14.6,-103.826 -14.295,-103.826 ; -14.6,-103.8 -14.295,-103.8 ; -14.6,-98.39 -14.549,-98.39 ; -14.6,-98.365 -14.549,-98.365 ; -14.575,-104.004 -14.346,-104.004 ; -14.575,-103.978 -14.346,-103.978 ; -14.575,-103.953 -14.346,-103.953 ; -14.575,-103.927 -14.321,-103.927 ; -14.575,-103.902 -14.321,-103.902 ; -14.575,-100.168 -14.473,-100.168 ; -14.575,-98.339 -14.524,-98.339 ; -14.575,-98.314 -14.524,-98.314 ; -14.575,-98.289 -14.549,-98.289 ; -14.549,-104.105 -14.397,-104.105 ; -14.549,-104.08 -14.372,-104.08 ; -14.549,-104.054 -14.372,-104.054 ; -14.549,-104.029 -14.372,-104.029 ; -14.549,-100.27 -14.473,-100.27 ; -14.549,-100.244 -14.473,-100.244 ; -14.549,-100.219 -14.473,-100.219 ; -14.549,-100.194 -14.473,-100.194 ; -14.524,-104.232 -14.448,-104.232 ; -14.524,-104.207 -14.422,-104.207 ; -14.524,-104.181 -14.422,-104.181 ; -14.524,-104.156 -14.422,-104.156 ; -14.524,-104.131 -14.397,-104.131 ; -14.524,-100.397 -14.499,-100.397 ; -14.524,-100.371 -14.499,-100.371 ; -14.524,-100.346 -14.499,-100.346 ; -14.524,-100.321 -14.473,-100.321 ; -14.524,-100.295 -14.473,-100.295 ; -14.499,-104.334 -14.473,-104.334 ; -14.499,-104.308 -14.473,-104.308 ; -14.499,-104.283 -14.448,-104.283 ; -14.499,-104.258 -14.448,-104.258 ; -14.473,-98.822 -13.584,-98.822 ; -14.473,-98.797 -13.584,-98.797 ; -14.473,-98.771 -13.584,-98.771 ; -14.473,-98.746 -13.584,-98.746 ; -14.473,-98.72 -13.584,-98.72 ; -14.473,-91.862 -13.787,-91.862 ; -14.448,-98.695 -13.584,-98.695 ; -14.448,-98.67 -13.61,-98.67 ; -14.448,-98.644 -13.635,-98.644 ; -14.448,-98.619 -13.635,-98.619 ; -14.448,-98.593 -13.635,-98.593 ; -14.448,-98.568 -13.635,-98.568 ; -14.448,-98.543 -13.635,-98.543 ; -14.422,-100.016 -13.914,-100.016 ; -14.422,-99.99 -13.914,-99.99 ; -14.422,-99.965 -13.889,-99.965 ; -14.422,-99.94 -13.889,-99.94 ; -14.422,-99.914 -13.864,-99.914 ; -14.422,-99.889 -13.864,-99.889 ; -14.422,-99.863 -13.838,-99.863 ; -14.422,-99.838 -13.813,-99.838 ; -14.422,-99.813 -13.813,-99.813 ; -14.422,-99.787 -13.787,-99.787 ; -14.422,-99.762 -13.787,-99.762 ; -14.422,-98.517 -13.61,-98.517 ; -14.422,-98.492 -13.559,-98.492 ; -14.422,-98.466 -13.559,-98.466 ; -14.397,-100.321 -14.346,-100.321 ; -14.397,-100.295 -14.346,-100.295 ; -14.397,-100.27 -14.321,-100.27 ; -14.397,-100.244 -14.321,-100.244 ; -14.397,-100.219 -14.295,-100.219 ; -14.397,-100.194 -14.295,-100.194 ; -14.397,-100.168 -14.27,-100.168 ; -14.397,-100.143 -14.27,-100.143 ; -14.397,-100.041 -13.94,-100.041 ; -14.397,-98.441 -14.321,-98.441 ; -14.397,-97.374 -13.965,-97.374 ; -14.397,-97.349 -13.965,-97.349 ; -14.397,-96.993 -13.889,-96.993 ; -14.372,-100.117 -14.219,-100.117 ; -14.372,-100.092 -13.94,-100.092 ; -14.372,-100.067 -13.94,-100.067 ; -14.372,-98.416 -14.321,-98.416 ; -14.372,-98.289 -13.559,-98.289 ; -14.372,-98.263 -13.559,-98.263 ; -14.372,-98.238 -13.559,-98.238 ; -14.372,-97.4 -13.965,-97.4 ; -14.372,-97.323 -13.965,-97.323 ; -14.372,-97.298 -13.965,-97.298 ; -14.372,-97.273 -13.965,-97.273 ; -14.372,-97.12 -13.965,-97.12 ; -14.372,-97.095 -13.965,-97.095 ; -14.372,-97.069 -13.965,-97.069 ; -14.372,-97.044 -13.965,-97.044 ; -14.372,-97.019 -13.965,-97.019 ; -14.372,-91.888 -13.94,-91.888 ; -14.346,-98.314 -13.559,-98.314 ; -14.346,-98.212 -13.559,-98.212 ; -14.346,-97.882 -13.787,-97.882 ; -14.346,-97.857 -13.787,-97.857 ; -14.346,-97.831 -13.787,-97.831 ; -14.346,-97.806 -13.787,-97.806 ; -14.346,-97.781 -13.787,-97.781 ; -14.346,-97.755 -13.787,-97.755 ; -14.346,-97.45 -13.965,-97.45 ; -14.346,-97.425 -13.965,-97.425 ; -14.346,-97.247 -13.965,-97.247 ; -14.346,-97.222 -13.965,-97.222 ; -14.346,-97.196 -13.965,-97.196 ; -14.346,-97.171 -13.965,-97.171 ; -14.346,-97.146 -13.965,-97.146 ; -14.321,-98.365 -13.559,-98.365 ; -14.321,-98.339 -13.559,-98.339 ; -14.321,-98.187 -13.559,-98.187 ; -14.321,-98.162 -13.533,-98.162 ; -14.321,-98.136 -13.533,-98.136 ; -14.321,-97.908 -13.787,-97.908 ; -14.321,-97.73 -13.787,-97.73 ; -14.321,-97.704 -13.787,-97.704 ; -14.321,-97.679 -13.787,-97.679 ; -14.321,-97.654 -13.787,-97.654 ; -14.321,-97.628 -13.787,-97.628 ; -14.321,-97.603 -13.991,-97.603 ; -14.321,-97.577 -13.991,-97.577 ; -14.321,-97.552 -13.991,-97.552 ; -14.321,-97.527 -13.991,-97.527 ; -14.321,-97.501 -13.991,-97.501 ; -14.321,-97.476 -13.965,-97.476 ; -14.295,-98.441 -13.559,-98.441 ; -14.295,-98.416 -13.559,-98.416 ; -14.295,-98.39 -13.559,-98.39 ; -14.295,-98.111 -13.838,-98.111 ; -14.295,-98.085 -13.813,-98.085 ; -14.295,-98.06 -13.813,-98.06 ; -14.295,-98.035 -13.813,-98.035 ; -14.295,-98.009 -13.813,-98.009 ; -14.295,-97.984 -13.813,-97.984 ; -14.295,-97.958 -13.813,-97.958 ; -14.295,-97.933 -13.787,-97.933 ; -14.27,-91.913 -13.991,-91.913 ; -14.245,-105.324 -13,-105.324 ; -14.219,-105.299 -13,-105.299 ; -14.219,-105.274 -13,-105.274 ; -14.219,-105.248 -13.025,-105.248 ; -14.194,-105.223 -13.025,-105.223 ; -14.194,-105.197 -13.025,-105.197 ; -14.194,-105.172 -13.025,-105.172 ; -14.168,-105.147 -13.051,-105.147 ; -14.168,-105.121 -13.051,-105.121 ; -14.168,-105.096 -13.051,-105.096 ; -14.168,-100.448 -14.143,-100.448 ; -14.168,-100.422 -14.143,-100.422 ; -14.168,-100.397 -14.118,-100.397 ; -14.168,-100.371 -14.118,-100.371 ; -14.168,-100.244 -14.092,-100.244 ; -14.168,-100.219 -14.092,-100.219 ; -14.168,-91.939 -14.041,-91.939 ; -14.143,-105.07 -13.076,-105.07 ; -14.143,-105.045 -13.076,-105.045 ; -14.143,-105.02 -13.076,-105.02 ; -14.143,-102.327 -14.067,-102.327 ; -14.143,-100.346 -14.118,-100.346 ; -14.143,-100.321 -14.118,-100.321 ; -14.143,-100.295 -14.118,-100.295 ; -14.143,-100.27 -14.092,-100.27 ; -14.118,-104.994 -13.076,-104.994 ; -14.118,-104.969 -13.102,-104.969 ; -14.118,-102.353 -14.041,-102.353 ; -14.092,-104.943 -13.102,-104.943 ; -14.092,-104.918 -13.102,-104.918 ; -14.092,-104.893 -13.102,-104.893 ; -14.092,-100.117 -13.965,-100.117 ; -14.067,-104.867 -13.127,-104.867 ; -14.067,-104.842 -13.127,-104.842 ; -14.067,-104.816 -13.127,-104.816 ; -14.067,-102.861 -13.94,-102.861 ; -14.067,-100.143 -13.965,-100.143 ; -14.041,-104.791 -13.152,-104.791 ; -14.041,-104.766 -13.152,-104.766 ; -14.041,-104.74 -13.152,-104.74 ; -14.041,-100.194 -13.991,-100.194 ; -14.041,-100.168 -13.965,-100.168 ; -14.016,-104.715 -13.152,-104.715 ; -14.016,-104.689 -13.178,-104.689 ; -14.016,-104.664 -13.178,-104.664 ; -13.991,-104.639 -13.178,-104.639 ; -13.991,-104.613 -13.203,-104.613 ; -13.991,-102.835 -13.94,-102.835 ; -13.965,-104.588 -13.203,-104.588 ; -13.965,-104.562 -13.203,-104.562 ; -13.965,-104.537 -13.203,-104.537 ; -13.94,-104.512 -13.229,-104.512 ; -13.94,-104.486 -13.229,-104.486 ; -13.94,-104.461 -13.229,-104.461 ; -13.94,-97.603 -13.813,-97.603 ; -13.94,-97.577 -13.813,-97.577 ; -13.94,-97.552 -13.813,-97.552 ; -13.94,-97.527 -13.813,-97.527 ; -13.914,-104.435 -13.254,-104.435 ; -13.914,-104.41 -13.254,-104.41 ; -13.914,-104.385 -13.254,-104.385 ; -13.914,-97.501 -13.813,-97.501 ; -13.914,-97.476 -13.838,-97.476 ; -13.914,-97.146 -13.889,-97.146 ; -13.914,-97.12 -13.889,-97.12 ; -13.914,-97.095 -13.889,-97.095 ; -13.889,-104.359 -13.254,-104.359 ; -13.889,-104.334 -13.279,-104.334 ; -13.889,-97.45 -13.864,-97.45 ; -13.864,-104.308 -13.279,-104.308 ; -13.864,-104.283 -13.279,-104.283 ; -13.864,-104.258 -13.305,-104.258 ; -13.838,-104.232 -13.305,-104.232 ; -13.838,-104.207 -13.305,-104.207 ; -13.838,-104.181 -13.305,-104.181 ; -13.838,-93.59 -13.66,-93.59 ; -13.813,-104.156 -13.33,-104.156 ; -13.813,-104.131 -13.33,-104.131 ; -13.813,-104.105 -13.33,-104.105 ; -13.787,-104.08 -13.33,-104.08 ; -13.787,-104.054 -13.356,-104.054 ; -13.787,-104.029 -13.356,-104.029 ; -13.787,-102.327 -13.635,-102.327 ; -13.787,-102.302 -13.508,-102.302 ; -13.787,-102.276 -13.762,-102.276 ; -13.787,-98.111 -13.533,-98.111 ; -13.787,-98.085 -13.508,-98.085 ; -13.762,-104.004 -13.356,-104.004 ; -13.762,-103.978 -13.381,-103.978 ; -13.762,-98.06 -13.508,-98.06 ; -13.762,-98.035 -13.508,-98.035 ; -13.762,-98.009 -13.508,-98.009 ; -13.737,-103.953 -13.381,-103.953 ; -13.737,-103.927 -13.381,-103.927 ; -13.737,-103.902 -13.381,-103.902 ; -13.737,-102.073 -13.584,-102.073 ; -13.737,-102.048 -13.635,-102.048 ; -13.737,-102.022 -13.635,-102.022 ; -13.737,-101.997 -13.584,-101.997 ; -13.737,-99.279 -13.584,-99.279 ; -13.737,-99.254 -13.584,-99.254 ; -13.737,-97.984 -13.508,-97.984 ; -13.737,-97.958 -13.508,-97.958 ; -13.711,-103.877 -13.406,-103.877 ; -13.711,-103.851 -13.406,-103.851 ; -13.711,-103.826 -13.406,-103.826 ; -13.711,-101.972 -13.33,-101.972 ; -13.711,-101.946 -13.356,-101.946 ; -13.711,-101.921 -13.33,-101.921 ; -13.711,-99.305 -13.584,-99.305 ; -13.711,-97.933 -13.508,-97.933 ; -13.686,-103.8 -13.432,-103.8 ; -13.686,-103.775 -13.432,-103.775 ; -13.686,-103.75 -13.432,-103.75 ; -13.686,-102.276 -13.406,-102.276 ; -13.686,-101.895 -13.279,-101.895 ; -13.686,-99.355 -13.61,-99.355 ; -13.686,-99.33 -13.61,-99.33 ; -13.686,-97.908 -13.533,-97.908 ; -13.686,-97.882 -13.559,-97.882 ; -13.686,-97.857 -13.584,-97.857 ; -13.686,-97.831 -13.584,-97.831 ; -13.686,-97.806 -13.584,-97.806 ; -13.66,-103.724 -13.432,-103.724 ; -13.66,-103.699 -13.457,-103.699 ; -13.66,-103.673 -13.457,-103.673 ; -13.66,-102.251 -13.381,-102.251 ; -13.66,-101.87 -13.254,-101.87 ; -13.66,-99.406 -13.61,-99.406 ; -13.66,-99.381 -13.61,-99.381 ; -13.66,-97.781 -13.584,-97.781 ; -13.66,-97.755 -13.584,-97.755 ; -13.66,-97.73 -13.584,-97.73 ; -13.66,-97.704 -13.61,-97.704 ; -13.66,-97.679 -13.61,-97.679 ; -13.635,-103.648 -13.457,-103.648 ; -13.635,-103.623 -13.483,-103.623 ; -13.635,-102.226 -13.305,-102.226 ; -13.635,-101.845 -13.254,-101.845 ; -13.635,-99.432 -13.61,-99.432 ; -13.61,-103.597 -13.483,-103.597 ; -13.61,-103.572 -13.483,-103.572 ; -13.61,-103.546 -13.483,-103.546 ; -13.61,-100.702 -13.406,-100.702 ; -13.584,-103.521 -13.508,-103.521 ; -13.584,-103.496 -13.508,-103.496 ; -13.584,-103.47 -13.508,-103.47 ; -13.584,-102.2 -13.533,-102.2 ; -13.584,-100.676 -13.432,-100.676 ; -13.584,-100.651 -13.457,-100.651 ; -13.584,-100.625 -13.508,-100.625 ; -13.559,-103.445 -13.508,-103.445 ; -13.559,-103.419 -13.533,-103.419 ; -13.559,-103.394 -13.533,-103.394 ; -13.533,-101.997 -13.305,-101.997 ; -13.533,-98.771 -13.305,-98.771 ; -13.533,-98.746 -13.305,-98.746 ; -13.533,-98.72 -13.305,-98.72 ; -13.533,-98.695 -13.33,-98.695 ; -13.533,-98.67 -13.432,-98.67 ; -13.533,-98.644 -13.457,-98.644 ; -13.533,-98.619 -13.457,-98.619 ; -13.533,-98.593 -13.483,-98.593 ; -13.508,-102.022 -13.381,-102.022 ; -13.508,-98.873 -13.279,-98.873 ; -13.508,-98.847 -13.279,-98.847 ; -13.508,-98.822 -13.279,-98.822 ; -13.508,-98.797 -13.305,-98.797 ; -13.508,-98.568 -13.483,-98.568 ; -13.508,-98.543 -13.483,-98.543 ; -13.483,-101.819 -13.279,-101.819 ; -13.483,-100.752 -13.381,-100.752 ; -13.483,-100.727 -13.381,-100.727 ; -13.483,-98.949 -13.432,-98.949 ; -13.483,-98.924 -13.279,-98.924 ; -13.483,-98.898 -13.279,-98.898 ; -13.457,-102.2 -13.203,-102.2 ; -13.457,-100.778 -13.432,-100.778 ; -13.457,-98.974 -13.432,-98.974 ; -13.457,-95.926 -13.432,-95.926 ; -13.457,-95.901 -13.406,-95.901 ; -13.406,-102.175 -13.051,-102.175 ; -13.406,-98.974 -13.279,-98.974 ; -13.406,-98.949 -13.279,-98.949 ; -13.406,-98.67 -13.33,-98.67 ; -13.381,-100.448 -13.229,-100.448 ; -13.381,-100.422 -13.254,-100.422 ; -13.381,-99.025 -13.279,-99.025 ; -13.381,-99 -13.279,-99 ; -13.381,-98.644 -13.33,-98.644 ; -13.381,-98.619 -13.356,-98.619 ; -13.381,-98.593 -13.356,-98.593 ; -13.381,-98.162 -13.305,-98.162 ; -13.381,-98.136 -13.33,-98.136 ; -13.381,-98.111 -13.356,-98.111 ; -13.356,-100.676 -13.229,-100.676 ; -13.356,-100.651 -13.152,-100.651 ; -13.356,-100.625 -13.076,-100.625 ; -13.356,-100.6 -13.102,-100.6 ; -13.356,-100.498 -13.305,-100.498 ; -13.356,-100.473 -13.279,-100.473 ; -13.356,-99.101 -13.279,-99.101 ; -13.356,-99.076 -13.279,-99.076 ; -13.356,-99.051 -13.279,-99.051 ; -13.356,-98.187 -13.279,-98.187 ; -13.33,-102.022 -13.305,-102.022 ; -13.33,-100.702 -13.305,-100.702 ; -13.33,-100.575 -13.102,-100.575 ; -13.33,-100.549 -13.152,-100.549 ; -13.33,-100.524 -13.305,-100.524 ; -13.33,-100.397 -13.279,-100.397 ; -13.33,-99.178 -13.279,-99.178 ; -13.33,-99.152 -13.279,-99.152 ; -13.33,-99.127 -13.279,-99.127 ; -13.33,-98.543 -10.155,-98.543 ; -13.33,-98.517 -10.13,-98.517 ; -13.33,-98.492 -10.104,-98.492 ; -13.33,-98.466 -10.104,-98.466 ; -13.33,-98.441 -10.841,-98.441 ; -13.33,-98.416 -10.816,-98.416 ; -13.33,-98.39 -10.816,-98.39 ; -13.33,-98.365 -10.79,-98.365 ; -13.33,-98.212 -13.279,-98.212 ; -13.305,-99.254 -13.279,-99.254 ; -13.305,-99.228 -13.279,-99.228 ; -13.305,-99.203 -13.279,-99.203 ; -13.305,-98.593 -10.206,-98.593 ; -13.305,-98.568 -10.181,-98.568 ; -13.305,-98.339 -10.765,-98.339 ; -13.279,-102.149 -13.025,-102.149 ; -13.279,-98.644 -10.257,-98.644 ; -13.279,-98.619 -10.231,-98.619 ; -13.254,-98.695 -10.333,-98.695 ; -13.254,-98.67 -10.308,-98.67 ; -13.254,-98.314 -10.739,-98.314 ; -13.254,-98.289 -10.739,-98.289 ; -13.229,-102.124 -13,-102.124 ; -13.229,-101.972 -13.203,-101.972 ; -13.229,-101.946 -13,-101.946 ; -13.229,-98.746 -10.384,-98.746 ; -13.229,-98.72 -10.358,-98.72 ; -13.229,-98.263 -10.714,-98.263 ; -13.229,-98.238 -10.689,-98.238 ; -13.229,-98.212 -10.689,-98.212 ; -13.203,-101.921 -12.975,-101.921 ; -13.203,-98.797 -10.358,-98.797 ; -13.203,-98.771 -10.384,-98.771 ; -13.203,-98.187 -10.663,-98.187 ; -13.203,-98.162 -10.638,-98.162 ; -13.178,-102.759 -12.238,-102.759 ; -13.178,-102.734 -12.238,-102.734 ; -13.178,-102.708 -12.213,-102.708 ; -13.178,-102.683 -12.213,-102.683 ; -13.178,-102.657 -12.213,-102.657 ; -13.178,-101.895 -12.949,-101.895 ; -13.178,-101.87 -12.949,-101.87 ; -13.178,-101.845 -12.949,-101.845 ; -13.178,-101.819 -12.924,-101.819 ; -13.178,-101.794 -12.924,-101.794 ; -13.178,-101.768 -12.873,-101.768 ; -13.178,-98.822 -10.155,-98.822 ; -13.178,-98.136 -10.638,-98.136 ; -13.178,-98.111 -10.612,-98.111 ; -13.152,-102.835 -12.263,-102.835 ; -13.152,-102.81 -12.263,-102.81 ; -13.152,-102.784 -12.238,-102.784 ; -13.152,-98.873 -10.206,-98.873 ; -13.152,-98.847 -10.181,-98.847 ; -13.152,-98.085 -10.612,-98.085 ; -13.152,-98.06 -10.587,-98.06 ; -13.152,-98.035 -10.587,-98.035 ; -13.127,-102.937 -12.289,-102.937 ; -13.127,-102.911 -12.289,-102.911 ; -13.127,-102.886 -12.263,-102.886 ; -13.127,-102.861 -12.263,-102.861 ; -13.127,-102.099 -13,-102.099 ; -13.127,-98.924 -10.282,-98.924 ; -13.127,-98.898 -10.231,-98.898 ; -13.127,-98.009 -10.587,-98.009 ; -13.127,-97.984 -10.587,-97.984 ; -13.102,-103.013 -12.314,-103.013 ; -13.102,-102.988 -12.314,-102.988 ; -13.102,-102.962 -12.289,-102.962 ; -13.102,-102.632 -12.187,-102.632 ; -13.102,-101.743 -12.213,-101.743 ; -13.102,-100.778 -13,-100.778 ; -13.102,-99 -10.308,-99 ; -13.102,-98.974 -10.333,-98.974 ; -13.102,-98.949 -10.333,-98.949 ; -13.102,-97.958 -10.562,-97.958 ; -13.102,-97.933 -10.562,-97.933 ; -13.102,-97.628 -12.746,-97.628 ; -13.076,-103.115 -12.34,-103.115 ; -13.076,-103.089 -12.34,-103.089 ; -13.076,-103.064 -12.314,-103.064 ; -13.076,-103.038 -12.314,-103.038 ; -13.076,-100.752 -12.975,-100.752 ; -13.076,-99.076 -10.308,-99.076 ; -13.076,-99.051 -10.308,-99.051 ; -13.076,-99.025 -10.308,-99.025 ; -13.076,-97.908 -12.162,-97.908 ; -13.076,-97.882 -12.187,-97.882 ; -13.076,-97.857 -12.187,-97.857 ; -13.076,-97.654 -12.035,-97.654 ; -13.051,-103.191 -12.365,-103.191 ; -13.051,-103.165 -12.365,-103.165 ; -13.051,-103.14 -12.34,-103.14 ; -13.051,-99.355 -10.587,-99.355 ; -13.051,-99.33 -10.562,-99.33 ; -13.051,-99.305 -10.536,-99.305 ; -13.051,-99.279 -10.511,-99.279 ; -13.051,-99.254 -10.485,-99.254 ; -13.051,-99.228 -10.46,-99.228 ; -13.051,-99.203 -10.409,-99.203 ; -13.051,-99.178 -10.384,-99.178 ; -13.051,-99.152 -10.358,-99.152 ; -13.051,-99.127 -10.333,-99.127 ; -13.051,-99.101 -10.308,-99.101 ; -13.051,-97.831 -12.187,-97.831 ; -13.051,-97.806 -12.187,-97.806 ; -13.051,-97.679 -12.06,-97.679 ; -13.025,-103.267 -12.39,-103.267 ; -13.025,-103.242 -12.365,-103.242 ; -13.025,-103.216 -12.365,-103.216 ; -13.025,-101.718 -12.213,-101.718 ; -13.025,-99.94 -11.349,-99.94 ; -13.025,-99.914 -11.298,-99.914 ; -13.025,-99.889 -11.273,-99.889 ; -13.025,-99.863 -11.222,-99.863 ; -13.025,-99.838 -11.197,-99.838 ; -13.025,-99.813 -11.146,-99.813 ; -13.025,-99.787 -11.12,-99.787 ; -13.025,-99.762 -11.095,-99.762 ; -13.025,-99.736 -11.07,-99.736 ; -13.025,-99.711 -11.044,-99.711 ; -13.025,-99.686 -11.019,-99.686 ; -13.025,-99.66 -10.993,-99.66 ; -13.025,-99.635 -10.968,-99.635 ; -13.025,-99.609 -10.943,-99.609 ; -13.025,-99.584 -10.892,-99.584 ; -13.025,-99.559 -10.866,-99.559 ; -13.025,-99.533 -10.816,-99.533 ; -13.025,-99.508 -10.79,-99.508 ; -13.025,-99.482 -10.739,-99.482 ; -13.025,-99.457 -10.714,-99.457 ; -13.025,-99.432 -10.689,-99.432